# EAGLE board CN-Cape-1.1 (EAGLE 7.7.0)
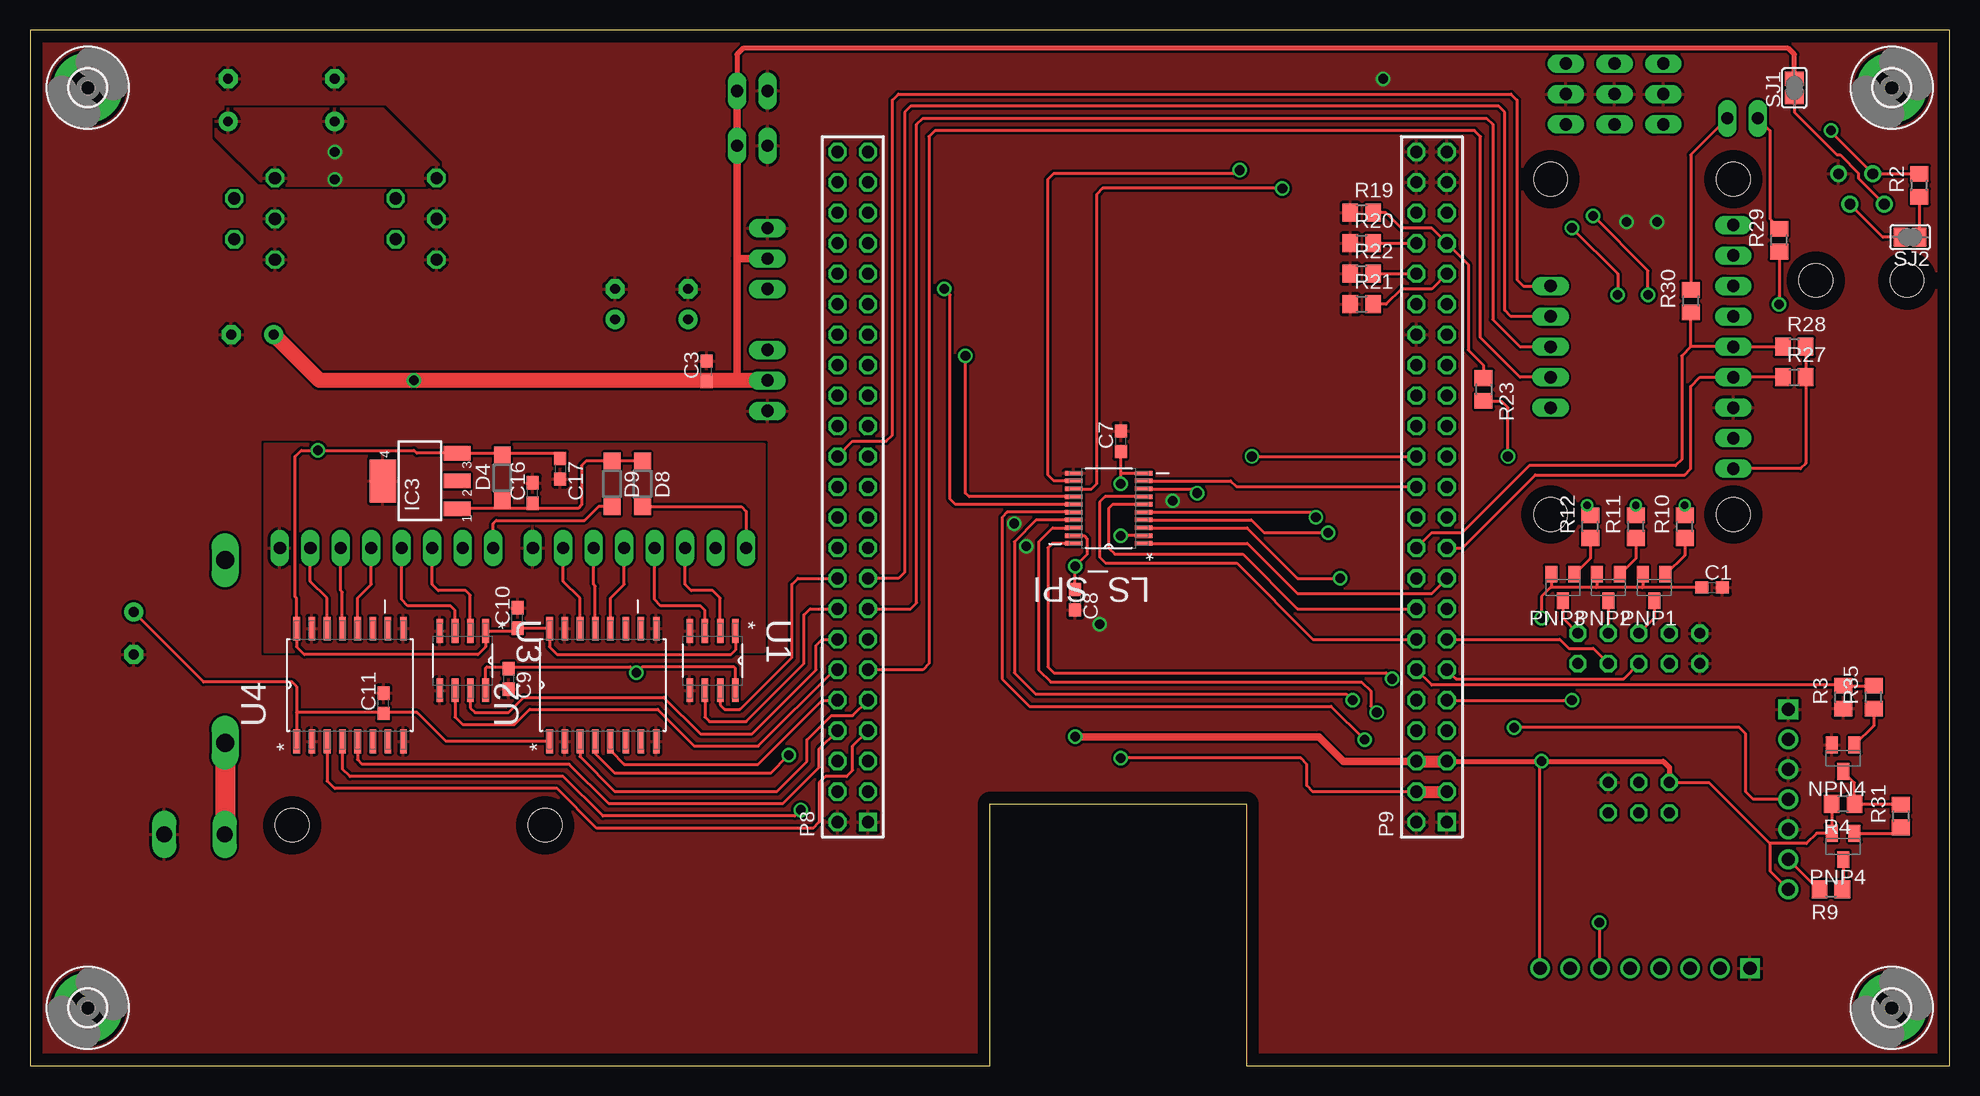
[diagram p0: board, top side]
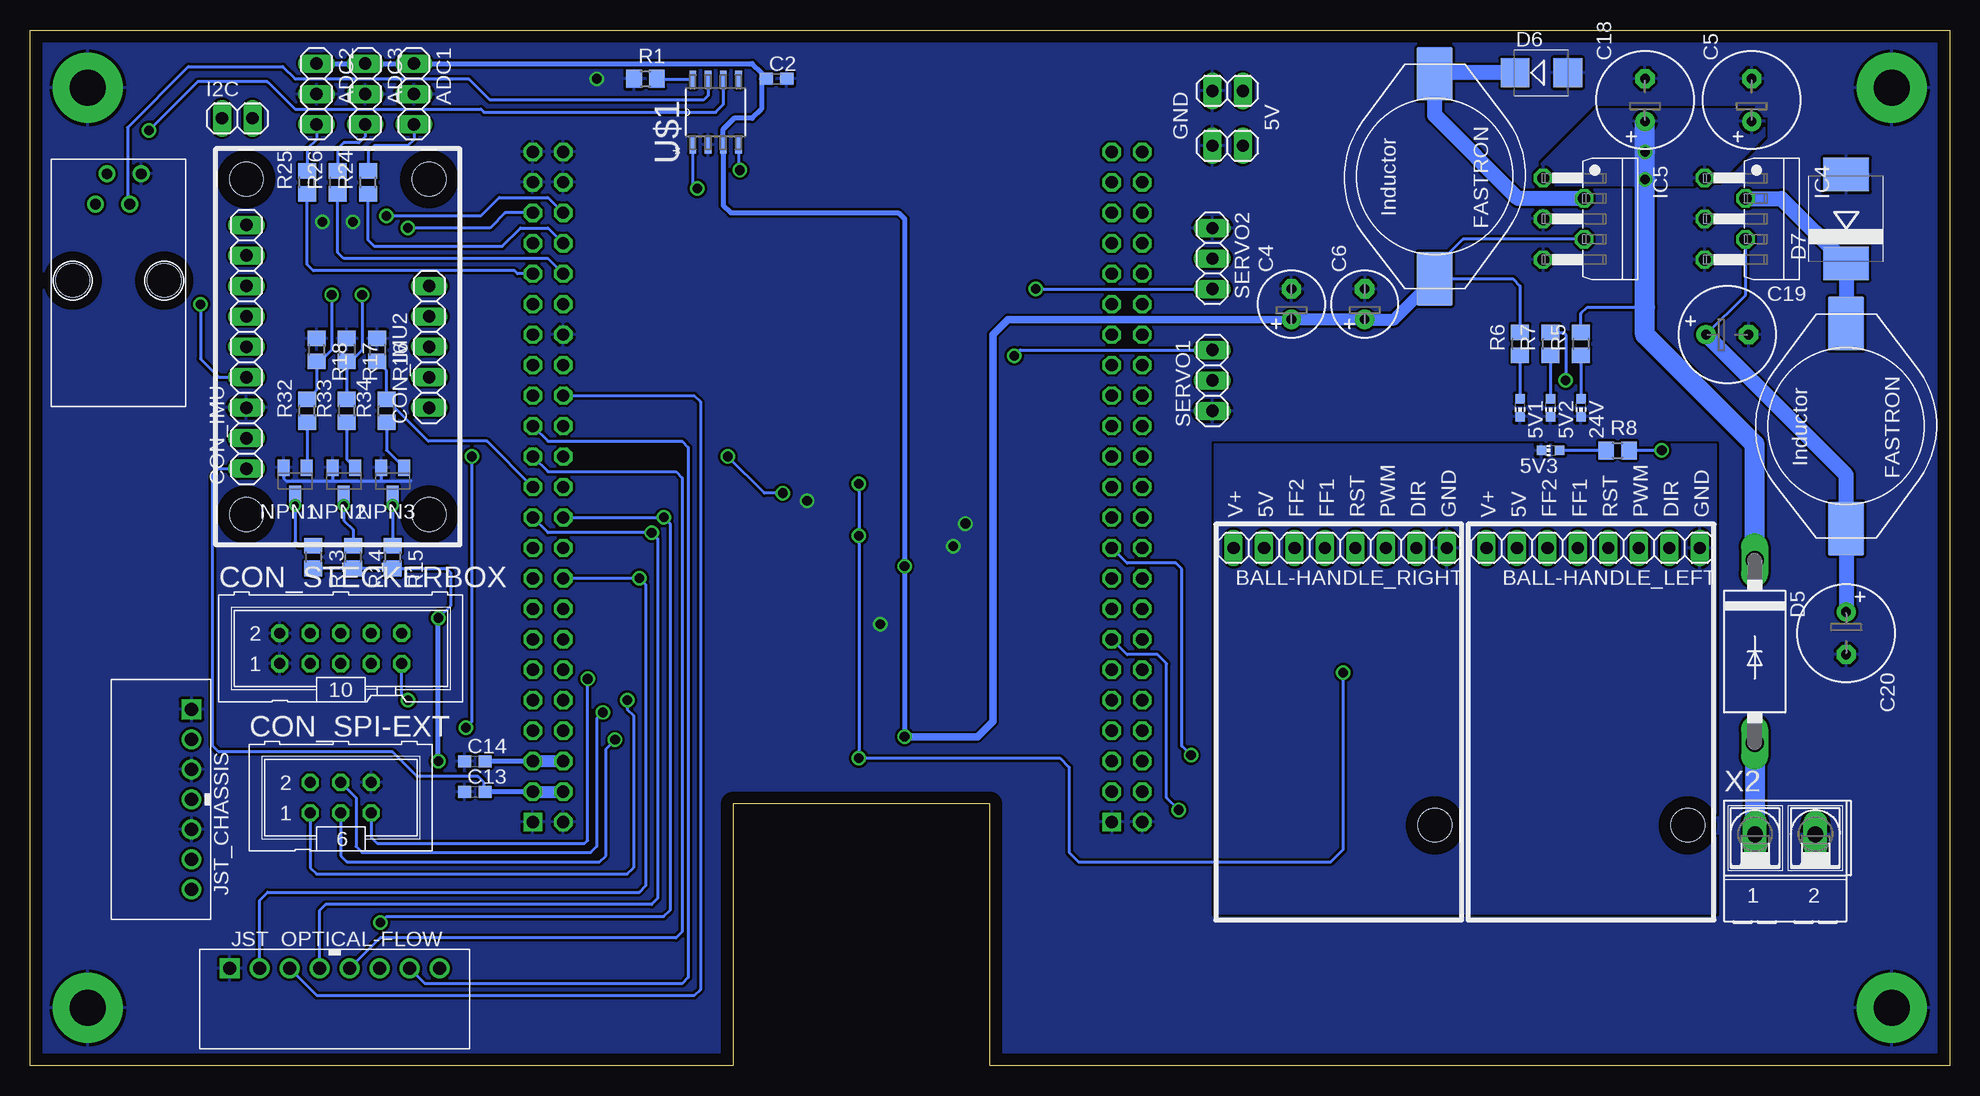
[diagram p1: board, bottom side, seen from below]

Size 160.02 x 86.36 mm. Coordinates in mm from the lower left corner, seen from the top.
Outline: 0,0 80.01,0 80.01,21.86 101.41,21.86 101.41,0 160.02,0 160.02,86.36 0,86.36 0,0
Copper layers (1*16): Top 0.035mm / dielectric 1.5mm / Bottom 0.035mm
Design rules "8mils": minimum track width 8mil, minimum drill 0.6mm, track to track 8mil, track to pad 8mil, pad to pad 8mil, via to via 8mil, smd to smd 8mil, copper to edge 40mil, drill to drill 10mil, minimum pad ring 10mil, minimum via ring 8mil, stop-mask expansion 0mil, vias tented up to drill 0mil, thermal gap 10mil
Holes 2.8 mm at 126.75,73.91 141.99,73.91 126.75,45.97 141.99,45.97 21.84,20.07 42.93,20.07

## Footprints (pad centres in the part's own frame; a part is rotated, then mirrored left to right if it is on the bottom)
CHIP-LED0603 = smd 0.8 x 0.8: A 0,-0.75; C 0,0.75
1X03 = drill 1.016 long: 1 -2.54,0; 2 0,0; 3 2.54,0
1X08 = drill 1.016 long: 1 -8.89,0; 2 -6.35,0; 3 -3.81,0; 4 -1.27,0; 5 1.27,0; 6 3.81,0; 7 6.35,0; 8 8.89,0
C0603 = smd 1.1 x 1: 1 -0.85,0; 2 0.85,0
E2,5-6 = drill 0.813 pad 1.6: + -1.27,0 | drill 0.813 pad 1.6 octagon: - 1.27,0
E3,5-8 = drill 0.813 pad 1.6: + -1.778,0 | drill 0.813 pad 1.6 octagon: - 1.778,0
RJ10 = drill 0.9: P$1 -1.905,6.55; P$2 -0.953,9.09; P$3 0.953,6.55; P$4 1.905,9.09 | hole 2.8: -3.81,0.2; 3.81,0.2
1X09 = drill 1.016 long: 1 -10.16,0; 2 -7.62,0; 3 -5.08,0; 4 -2.54,0; 5 0,0; 6 2.54,0; 7 5.08,0; 8 7.62,0; 9 10.16,0
1X05 = drill 1.016 long: 1 -5.08,0; 2 -2.54,0; 3 0,0; 4 2.54,0; 5 5.08,0
ML6 = drill 0.914 octagon: 1 -2.54,-1.27; 2 -2.54,1.27; 3 0,-1.27; 4 0,1.27; 5 2.54,-1.27; 6 2.54,1.27
ML10 = drill 0.914 octagon: 1 -5.08,-1.27; 2 -5.08,1.27; 3 -2.54,-1.27; 4 -2.54,1.27; 5 0,-1.27; 6 0,1.27; 7 2.54,-1.27; 8 2.54,1.27; 9 5.08,-1.27; 10 5.08,1.27
SOD123 = smd 1.4 x 1.4: A 1.9,0; C -1.9,0
DO27-15 = drill 1.499 long: A 7.62,0; C -7.62,0
SMB = smd 2.4 x 2.4: A 2.2,0; C -2.2,0
SMC = smd 2.8 x 3.8: A 3.7,0; C -3.7,0
3,0-PAD = drill 3 pad 5.842: B3,0 0,0
1X02 = drill 1.016 long: 1 -1.27,0; 2 1.27,0
SOT223 = smd 1.219 x 2.235: 1 -2.311,-3.099; 2 0,-3.099; 3 2.311,-3.099 | smd 3.6 x 2.2: 4 0,3.099
TO220-5_STAGGERED = drill 1.016 octagon: !EN 3.404,-3.404; FB 1.702,0; GND 0,-3.404; IN -3.404,-3.404; OUT -1.702,0
S7B-EH = drill 1.1 square: 1 7.5,0 | drill 1.1: 2 5,0; 3 2.5,0; 4 0,0; 5 -2.5,0; 6 -5,0; 7 -7.5,0
S8B-EH = drill 1.1 square: 1 8.75,0 | drill 1.1: 2 6.25,0; 3 3.75,0; 4 1.25,0; 5 -1.25,0; 6 -3.75,0; 7 -6.25,0; 8 -8.75,0
PISR = smd 4.5 x 3: P$1 -8.55,0; P$2 8.55,0
SOP65P640X120-20N = smd 1.473 x 0.356: 1 -2.921,2.921; 2 -2.921,2.286; 3 -2.921,1.626; 4 -2.921,0.965; 5 -2.921,0.33; 6 -2.921,-0.33; 7 -2.921,-0.965; 8 -2.921,-1.626; 9 -2.921,-2.286; 10 -2.921,-2.921; 11 2.921,-2.921; 12 2.921,-2.286; 13 2.921,-1.626; 14 2.921,-0.965; 15 2.921,-0.33; 16 2.921,0.33; 17 2.921,0.965; 18 2.921,1.626; 19 2.921,2.286; 20 2.921,2.921
SOT23-BEC = smd 1 x 1.4: B -0.95,-1.1; C 0,1.1; E 0.95,-1.1
2X23 = drill 1.016 square: 1 -26.67,-1.27 | drill 1.016 octagon: 2 -26.67,1.27; 3 -24.13,-1.27; 4 -24.13,1.27; 5 -21.59,-1.27; 6 -21.59,1.27; 7 -19.05,-1.27; 8 -19.05,1.27; 9 -16.51,-1.27; 10 -16.51,1.27; 11 -13.97,-1.27; 12 -13.97,1.27; 13 -11.43,-1.27; 14 -11.43,1.27; 15 -8.89,-1.27; 16 -8.89,1.27; 17 -6.35,-1.27; 18 -6.35,1.27; 19 -3.81,-1.27; 20 -3.81,1.27; 21 -1.27,-1.27; 22 -1.27,1.27; 23 1.27,-1.27; 24 1.27,1.27; 25 3.81,-1.27; 26 3.81,1.27; 27 6.35,-1.27; 28 6.35,1.27; 29 8.89,-1.27; 30 8.89,1.27; 31 11.43,-1.27; 32 11.43,1.27; 33 13.97,-1.27; 34 13.97,1.27; 35 16.51,-1.27; 36 16.51,1.27; 37 19.05,-1.27; 38 19.05,1.27; 39 21.59,-1.27; 40 21.59,1.27; 41 24.13,-1.27; 42 24.13,1.27; 43 26.67,-1.27; 44 26.67,1.27; 45 29.21,-1.27; 46 29.21,1.27
R0805 = smd 1.3 x 1.5: 1 -0.95,0; 2 0.95,0
SJ = smd 1.168 x 1.6: 1 -0.762,0; 2 0.762,0
SOIC127P600X175-8N = smd 1.981 x 0.559: 1 -2.464,1.905; 2 -2.464,0.635; 3 -2.464,-0.635; 4 -2.464,-1.905; 5 2.464,-1.905; 6 2.464,-0.635; 7 2.464,0.635; 8 2.464,1.905
SOIC127P1032X265-16N = smd 1.981 x 0.559: 1 -4.699,4.445; 2 -4.699,3.175; 3 -4.699,1.905; 4 -4.699,0.635; 5 -4.699,-0.635; 6 -4.699,-1.905; 7 -4.699,-3.175; 8 -4.699,-4.445; 9 4.699,-4.445; 10 4.699,-3.175; 11 4.699,-1.905; 12 4.699,-0.635; 13 4.699,0.635; 14 4.699,1.905; 15 4.699,3.175; 16 4.699,4.445
SOIC127P600X175-8N' = smd 1.473 x 0.559: 1 -2.718,1.905; 2 -2.718,0.635; 3 -2.718,-0.635; 4 -2.718,-1.905; 5 2.718,-1.905; 6 2.718,-0.635; 7 2.718,0.635; 8 2.718,1.905
AK500/2-H = drill 1.321 long: 1 -2.515,0; 2 2.515,0

## Placement (x,y rotation side)
5V1  [CHIP-LED0603]  35.81,54.86 180 bottom
5V2  [CHIP-LED0603]  33.27,54.86 180 bottom
5V3  [CHIP-LED0603]  33.27,51.31 90 bottom
24V  [CHIP-LED0603]  30.73,54.86 180 bottom
ADC1  [1X03]  128.02,81.03 270 bottom
ADC2  [1X03]  136.14,81.03 270 bottom
ADC3  [1X03]  132.08,81.03 270 bottom
BALL-HANDLE_LEFT  [1X08]  29.72,43.18 180 bottom
BALL-HANDLE_RIGHT  [1X08]  50.8,43.18 180 bottom
C1  100nF  [C0603]  140.21,39.88 0 top
C2  100nF  [C0603]  97.79,82.3 0 bottom
C3  100nF  [C0603]  56.39,57.91 90 top
C4  220µF  [E2,5-6]  54.86,63.5 90 bottom
C5  220µF  [E3,5-8]  16.51,80.52 90 bottom
C6  220µF  [E2,5-6]  48.77,63.5 90 bottom
C7  100nF  [C0603]  90.93,52.07 90 top
C8  100nF  [C0603]  87.12,38.86 270 top
C9  100nF  [C0603]  39.88,32.26 270 top
C10  100nF  [C0603]  40.64,37.34 90 top
C11  100nF  [C0603]  29.46,30.23 90 top
C13  100nF  [C0603]  122.94,22.86 0 bottom
C14  100nF  [C0603]  122.94,25.4 0 bottom
C16  100nF  [C0603]  41.91,47.75 90 top
C17  100nF  [C0603]  44.2,49.78 270 top
C18  220µF  [E3,5-8]  25.4,80.52 90 bottom
C19  470µF  [E3,5-8]  18.54,60.96 0 bottom
C20  470µF  [E3,5-8]  8.64,36.07 270 bottom
CAN  RJ10  [RJ10]  152.65,65.28 0 bottom
CON_IMU  [1X09]  141.99,59.94 90 bottom
CON_IMU2  [1X05]  126.75,59.94 90 bottom
CON_SPI-EXT  [ML6]  134.11,22.35 0 bottom
CON_STECKERBOX  [ML10]  134.11,34.8 0 bottom
D4  [SOD123]  39.37,49.02 90 top
D5  BY550  [DO27-15]  16.26,34.54 270 bottom
D6  MBRS140  [SMB]  34.04,82.8 0 bottom
D7  MBRS360  [SMC]  8.64,70.61 90 bottom
D8  [SOD123]  51.05,48.51 270 top
D9  [SOD123]  48.51,48.51 270 top
H1  MOUNT-PAD-ROUND3.0  [3,0-PAD]  155.19,4.83 0 top
H2  MOUNT-PAD-ROUND3.0  [3,0-PAD]  4.83,81.53 0 top
H3  MOUNT-PAD-ROUND3.0  [3,0-PAD]  155.19,81.53 0 top
H4  MOUNT-PAD-ROUND3.0  [3,0-PAD]  4.83,4.83 0 top
I2C  [1X02]  142.75,78.99 0 bottom
IC3  LM340MP-05  [SOT223]  32.51,48.77 90 top
IC4  LM2576  [TO220-5_STAGGERED]  17.02,70.61 270 bottom
IC5  LM2575  [TO220-5_STAGGERED]  30.48,70.61 270 bottom
JP3  [1X02]  60.2,76.71 180 bottom
JP4  [1X02]  60.2,81.28 180 bottom
JST_CHASSIS  S7PIN  [S7B-EH]  146.56,22.22 90 bottom
JST_OPTICAL-FLOW  S8PIN  [S8B-EH]  134.62,8.13 180 bottom
L1  330µH  [PISR]  42.93,74.17 270 bottom
L2  100µH  [PISR]  8.64,53.34 270 bottom
LS_SPI  TXB0108PWR  [SOP65P640X120-20N]  89.92,46.48 180 top
NPN1  BC849SMD  [SOT23-BEC]  137.92,48.77 180 bottom
NPN2  BC849SMD  [SOT23-BEC]  133.86,48.77 180 bottom
NPN3  BC849SMD  [SOT23-BEC]  129.79,48.77 180 bottom
NPN4  BC849SMD  [SOT23-BEC]  151.13,25.65 180 top
P8  BeagleBoard 2x23  [2X23]  68.58,46.99 90 top
P9  BeagleBoard 2x23  [2X23]  116.84,46.99 90 top
PNP1  BC858BSMD  [SOT23-BEC]  135.38,39.88 180 top
PNP2  BC858BSMD  [SOT23-BEC]  131.57,39.88 180 top
PNP3  BC858BSMD  [SOT23-BEC]  127.76,39.88 180 top
PNP4  BC858BSMD  [SOT23-BEC]  151.13,18.29 180 top
R1  1k  [R0805]  108.71,82.3 0 bottom
R2  120  [R0805]  157.48,73.41 90 top
R3  10k  [R0805]  151.13,30.73 90 top
R4  10k  [R0805]  151.13,21.84 180 top
R5  1200  [R0805]  30.73,60.2 90 bottom
R6  120  [R0805]  35.81,60.2 90 bottom
R7  120  [R0805]  33.27,60.2 90 bottom
R8  120  [R0805]  27.69,51.31 0 bottom
R9  ADJ  [R0805]  150.11,14.73 180 top
R10  10k  [R0805]  137.92,44.96 90 top
R11  10k  [R0805]  133.86,44.96 90 top
R12  10k  [R0805]  130.05,44.96 90 top
R13  10k  [R0805]  136.4,42.42 270 bottom
R14  10k  [R0805]  133.1,42.42 270 bottom
R15  10k  [R0805]  129.79,42.42 270 bottom
R16  10k  [R0805]  131.06,59.69 270 bottom
R17  10k  [R0805]  133.6,59.69 270 bottom
R18  10k  [R0805]  136.14,59.69 270 bottom
R19  1k  [R0805]  111,71.12 0 top
R20  1k  [R0805]  111,68.58 0 top
R21  1k  [R0805]  111,63.5 0 top
R22  1k  [R0805]  111,66.04 0 top
R23  1,8k  [R0805]  121.16,56.39 270 top
R24  1,8k  [R0805]  131.83,73.66 90 bottom
R25  1,8k  [R0805]  136.91,73.66 90 bottom
R26  1,8k  [R0805]  134.37,73.66 90 bottom
R27  10k  [R0805]  147.07,57.4 0 top
R28  10k  [R0805]  147.07,59.94 0 top
R29  330  [R0805]  145.8,68.83 90 top
R30  330  [R0805]  138.43,63.75 90 top
R31  10k  [R0805]  155.96,20.83 90 top
R32  10k  [R0805]  136.91,54.61 90 bottom
R33  10k  [R0805]  133.6,54.61 90 bottom
R34  10k  [R0805]  130.3,54.61 90 bottom
R35  10k  [R0805]  153.67,30.73 90 top
SERVO1  [1X03]  61.47,57.15 90 bottom
SERVO2  [1X03]  61.47,67.31 270 bottom
SJ1  [SJ]  147.07,81.53 90 top
SJ2  [SJ]  156.72,69.09 180 top
U1  ADUM1200ARZ  [SOIC127P600X175-8N]  56.9,33.78 270 top
U2  ADUM1300ARWZ  [SOIC127P1032X265-16N]  47.75,31.75 90 top
U3  ADUM1200ARZ  [SOIC127P600X175-8N]  36.07,33.78 270 top
U4  ADUM1300ARWZ  [SOIC127P1032X265-16N]  26.67,31.75 90 top
U$1  MCP2551-I/SN  [SOIC127P600X175-8N']  102.87,79.5 90 bottom
X2  [AK500/2-H]  13.72,19.3 0 bottom

## Library data of the parts
5V1-5V3 24V = led
ADC1-ADC3 BALL-HANDLE_LEFT BALL-HANDLE_RIGHT CON_IMU CON_IMU2 I2C JP3 JP4 SERVO1 SERVO2 = pinhead
C1-C11 C13 C14 C16-C20 R1-R35 = rcl
CAN = ownParts
CON_SPI-EXT CON_STECKERBOX = con-ml
D4 D8 D9 = diode; REICHELT: SD 101BW
D5-D7 = diode
H1-H4 = holes
IC3 = linear
IC4 IC5 = to220-custom
JST_CHASSIS JST_OPTICAL-FLOW = jst_eh
L1 L2 = inductor_FASTRON
LS_SPI = TI-TXB0108PWR; MPN: TXB0108PWR; OC_FARNELL: 1494945; OC_NEWARK: 27M1151; PACKAGE: TSSOP-20; SUPPLIER: Texas Instruments
NPN1-NPN4 = transistor-npn
P8 P9 = pinhead-2x23
PNP1-PNP4 = transistor-pnp
SJ1 SJ2 = jumper
U1 U3 = ADUM1200; MPN: ADUM1200ARZ; OC_FARNELL: 1078204; OC_NEWARK: 19M0750; PACKAGE: SOIC-8; SUPPLIER: Analog Devices
U2 U4 = ADUM1300; MPN: ADUM1300ARWZ; OC_FARNELL: 1226209; OC_NEWARK: 19M8751; PACKAGE: SOIC-16; SUPPLIER: Analog Devices
U$1 = Microchip-MCP2551-I_SN; MPN: MCP2551-I/SN; OC_FARNELL: 9758569; OC_NEWARK: 69K7604; PACKAGE: SOIC-8; SUPPLIER: Microchip
X2 = con-ptr500

## Nets
!BH_L_RESET: BALL-HANDLE_LEFT.4 U4.12
!BH_L_RESET_3V: P8.8 U4.5
!BH_R_RESET: BALL-HANDLE_RIGHT.4 U2.12
!BH_R_RESET_3V: P8.10 U2.5
+3V3: C7.1 C9.1 C13.2 CON_IMU.1 LS_SPI.2 LS_SPI.10 P9.3 P9.4 R27.2 R28.2 U1.8 U3.8
+5V/1: ADC1.1 ADC2.1 ADC3.1 C1.1 C2.1 C4.+ C6.+ C8.1 C14.2 CON_SPI-EXT.2 IC5.FB JST_CHASSIS.7 JST_OPTICAL-FLOW.8 L1.P$2 LS_SPI.19 P9.5 P9.6 PNP1.E PNP2.E PNP3.E PNP4.E R4.2 R6.2 R13.2 R14.2 R15.2 U$1.3
+5V/2: C3.1 C11.1 C19.+ C20.+ IC4.FB JP3.1 JP4.1 L2.P$2 R7.2 SERVO1.2 SERVO2.2 SJ1.2 U2.1 U4.1
+5V/3: C10.1 C17.1 D4.A IC3.3 R8.2 U1.1 U2.16 U3.1 U4.16
+24V: C5.+ C18.+ D5.C IC4.IN IC5.IN R5.2
+24V/3: C16.1 D4.C D8.C D9.C IC3.1
ADC0_1.8V: P9.39 R19.2 R23.1
ADC1: ADC1.3 R24.2
ADC1_1.8V: P9.40 R20.2 R24.1
ADC2: ADC2.3 R25.2
ADC2_1.8V: P9.37 R21.2 R25.1
ADC3: ADC3.3 R26.2
ADC3_1.8V: P9.38 R22.2 R26.1
BH_L_DIR: BALL-HANDLE_LEFT.2 U4.14
BH_L_DIR_3V: P8.7 U4.3
BH_L_FF1: BALL-HANDLE_LEFT.5 U3.3
BH_L_FF1_3V: P8.12 U3.6
BH_L_FF2: BALL-HANDLE_LEFT.6 U3.2
BH_L_FF2_3V: P8.14 U3.7
BH_L_PWM: BALL-HANDLE_LEFT.3 U4.13
BH_L_PWM_3V: P8.13 U4.4
BH_R_DIR: BALL-HANDLE_RIGHT.2 U2.14
BH_R_DIR_3V: P8.9 U2.3
BH_R_FF1: BALL-HANDLE_RIGHT.5 U1.3
BH_R_FF1_3V: P8.16 U1.6
BH_R_FF2: BALL-HANDLE_RIGHT.6 U1.2
BH_R_FF2_3V: P8.18 U1.7
BH_R_PWM: BALL-HANDLE_RIGHT.3 U2.13
BH_R_PWM_3V: P8.19 U2.4
CAN_RX: LS_SPI.12 U$1.4
CAN_RX_3V: LS_SPI.9 P9.24
CAN_TX: LS_SPI.13 U$1.1
CAN_TX_3V: LS_SPI.8 P9.26
CANH: CAN.P$3 SJ2.2 U$1.7
CANL: CAN.P$2 R2.2 U$1.6
DRDY: CON_IMU2.3 P8.15
GND: 5V1.C 5V2.C 24V.C ADC1.2 ADC2.2 ADC3.2 C1.2 C2.2 C3.2 C4.- C5.- C6.- C7.2 C8.2 C9.2 C11.2 C13.1 C14.1 C18.- C19.- C20.- CAN.P$4 CON_IMU.3 CON_SPI-EXT.6 CON_STECKERBOX.1 CON_STECKERBOX.2 D6.A D7.A H1.B3,0 H2.B3,0 H3.B3,0 H4.B3,0 IC4.!EN IC4.GND IC5.!EN IC5.GND JP3.2 JP4.2 JST_CHASSIS.1 JST_CHASSIS.3 JST_CHASSIS.5 JST_OPTICAL-FLOW.1 LS_SPI.11 NPN1.E NPN2.E NPN3.E NPN4.E P8.1 P8.2 P9.1 P9.2 P9.34 P9.43 P9.44 P9.45 P9.46 R1.1 R3.1 R16.1 R17.1 R18.1 R19.1 R20.1 R21.1 R22.1 SERVO1.1 SERVO2.1 U1.5 U2.2 U2.8 U3.5 U4.2 U4.8 U$1.2 X2.2
GND3: 5V3.C BALL-HANDLE_LEFT.1 BALL-HANDLE_RIGHT.1 C10.2 C16.2 C17.2 IC3.4 U1.4 U2.9 U2.15 U3.4 U4.9 U4.15
I2C2_SCL: CON_IMU.4 P9.19 R27.1 R29.1
I2C2_SDA: CON_IMU.5 P9.20 R28.1 R30.1
INT1: CON_IMU2.4 P8.17
INT2: CON_IMU2.5 P8.26
INTG: CON_IMU2.2 P8.11
LB_ADC: JST_CHASSIS.4 R23.2
N$1: NPN1.C R10.2 R13.1
N$2: NPN2.C R11.2 R14.1
N$3: NPN4.C R4.1 R31.2
N$4: NPN3.C R12.2 R15.1
N$5: D5.A X2.1
N$6: 24V.A R5.1
N$7: 5V1.A R6.1
N$8: 5V2.A R7.1
N$9: R1.2 U$1.8
N$10: R2.1 SJ2.1
N$11: D6.C IC5.OUT L1.P$1
N$12: D7.C IC4.OUT L2.P$1
N$13: BALL-HANDLE_LEFT.8 D9.A
N$14: BALL-HANDLE_RIGHT.8 D8.A
N$15: 5V3.A R8.1
N$16: JST_CHASSIS.6 R9.2
N$17: I2C.1 R29.2
N$18: I2C.2 R30.2
N$19: CAN.P$1 SJ1.1
N$20: PNP1.B R10.1
N$21: PNP2.B R11.1
N$22: PNP3.B R12.1
N$23: PNP4.B R31.1
N$24: NPN1.B R32.1
N$25: NPN2.B R33.1
N$26: NPN3.B R34.1
N$27: NPN4.B R35.1
OF_LED: PNP4.C R9.1
OF_LED_3V: P9.12 R3.2 R35.2
OF_NCS_3V: JST_OPTICAL-FLOW.3 P9.30
OF_NPD_3V: JST_OPTICAL-FLOW.5 P9.25
OF_RST_3V: JST_OPTICAL-FLOW.7 P9.27
SERVO_PWM: LS_SPI.14 SERVO1.3
SERVO_PWM2: LS_SPI.15 SERVO2.3
SERVO_PWM2_3V: LS_SPI.6 P9.16
SERVO_PWM_3V: LS_SPI.7 P9.14
SPI0_CLK: JST_OPTICAL-FLOW.6 LS_SPI.5 P9.22
SPI0_CS: LS_SPI.1 P9.17
SPI0_D0_MISO: JST_OPTICAL-FLOW.4 LS_SPI.4 P9.21
SPI0_D1_MOSI: JST_OPTICAL-FLOW.2 LS_SPI.3 P9.18
SPI_CLK: CON_SPI-EXT.3 LS_SPI.16
SPI_CS: CON_SPI-EXT.5 LS_SPI.20
SPI_MISO: CON_SPI-EXT.1 LS_SPI.17
SPI_MOSI: CON_SPI-EXT.4 LS_SPI.18
SW_BUNDLE-LED: CON_STECKERBOX.8 PNP2.C
SW_BUNDLE-LED_3V: P9.41 R17.2 R33.2
SW_BUNDLE_3V: CON_STECKERBOX.7 P9.13
SW_POWER-LED: CON_STECKERBOX.10 PNP3.C
SW_POWER-LED_3V: P9.23 R16.2 R34.2
SW_PWR_BUT: CON_STECKERBOX.9 P9.9
SW_VISION-LED: CON_STECKERBOX.6 PNP1.C
SW_VISION-LED_3V: P9.42 R18.2 R32.2
SW_VISION_3V: CON_STECKERBOX.5 P9.11

## Tracks (layer width: path | path; a pad name or v marks a point on that pad's centre or on a via)
!BH_L_RESET
  Top 0.254: U4.12 27.3,38.99 28.45,40.13 BALL-HANDLE_LEFT.4
!BH_L_RESET_3V
  Top 0.254: U4.5 27.3,25.53 27.69,25.15 44.96,25.15 48.26,21.84 62.74,21.84 65.79,24.89 65.79,26.42 P8.8
!BH_R_RESET
  Top 0.254: U2.12 48.39,38.99 49.53,40.13 BALL-HANDLE_RIGHT.4
!BH_R_RESET_3V
  Top 0.254: P8.10 66.04,30.48 60.71,25.15 49.53,25.15 48.39,26.29 U2.5
+3V3  (via drill 0.8)
  Top 0.254: 39.88,33.27 38.1,33.27 37.97,33.15 U3.8 | U1.8 58.8,33.15 58.67,33.27 51.05,33.27 v50.55,32.77 50.04,33.27 39.88,33.27 | P9.4 106.93,22.86 106.43,23.37 106.43,25.15 105.92,25.65 v90.93,25.65 | LS_SPI.2 v90.93,44.2 | C7.1 v90.93,48.51 90.93,49.4 LS_SPI.10 | CON_IMU.1 147.57,49.78 148.02,50.23 R27.2 R28.2 | C9.1 39.88,33.27
  Top 1.016: P9.4 P9.3
  Bottom 0.254: v90.93,48.51 v90.93,44.2 v90.93,25.65 74.17,25.65 73.41,24.89 73.41,17.78 72.64,17.02 51.56,17.02 50.55,18.03 v50.55,32.77 | C13.2 122.17,22.95 122.17,23.62 122.68,24.13 127.76,24.13 129.79,26.16 144.27,26.16 144.78,26.67 144.78,49.28 144.27,49.78 CON_IMU.1
  Bottom 0.406: P9.3 C13.2
  Bottom 1.016: P9.3 P9.4
+5V/1  (via drill 0.8)
  Top 0.254: PNP1.E 134.43,39.94 | 134.43,39.94 134.37,39.88 130.56,39.88 | 130.56,39.88 126.75,39.88 | PNP3.E 126.81,39.94 126.75,39.88 | R4.2 PNP4.E 148.93,19.39 148.08,18.54 145.03,18.54 | 145.03,18.54 145.03,16.24 JST_CHASSIS.7 | CON_SPI-EXT.2 139.95,23.62 145.03,18.54 | JST_OPTICAL-FLOW.8 125.87,25.29 v125.98,25.4 | LS_SPI.19 87.88,44.2 88.14,43.94 88.14,42.67 v87.12,41.66 C8.1 | 126.75,39.88 125.98,39.12 v125.98,37.34 | PNP2.E 130.62,39.94 130.56,39.88 | C1.1 134.43,39.88 134.43,39.94
  Top 0.406: P9.5 v125.98,25.4 136.14,25.4 136.65,24.89 CON_SPI-EXT.2
  Top 0.61: v87.12,27.43 107.44,27.43 109.47,25.4 P9.6
  Top 1.016: P9.6 P9.5
  Bottom 0.254: R13.2 R14.2 R15.2 125.29,41.47 124.97,41.15 124.97,38.35 v125.98,37.34 | IC5.FB 40.56,68.91 42.93,66.55 L1.P$2 36.41,65.62 35.81,65.02 R6.2 | C2.1 99.06,82.3
  Bottom 0.406: P9.5 C14.2 | ADC2.1 ADC3.1 ADC1.1 99.82,83.57 99.06,82.8 99.06,82.3 99.06,79.76 99.82,78.99 101.35,78.99 102.23,78.11 U$1.3 102.23,71.75 101.6,71.12 87.63,71.12 87.12,70.61 v87.12,41.66 v87.12,27.43 | v125.98,25.4 v125.98,37.34
  Bottom 0.61: v87.12,27.43 81.03,27.43 79.76,28.7 79.76,60.96 78.49,62.23 C4.+
  Bottom 1.016: P9.6 P9.5 | L1.P$2 46.31,62.23 C6.+ C4.+
  Bottom 1.27: L1.P$2 43.01,65.53
+5V/2  (via drill 0.8)
  Top 0.254: C3.1 57.57,57.06 57.66,57.15 | C20.+ 14.48,32 21.84,32 22.23,31.62 22.23,29.46 | 22.23,29.46 U4.1 | U2.1 34.67,27.05 32.26,29.46 29.46,29.46 | 29.46,29.46 22.23,29.46 | C11.1 29.46,29.46
  Top 0.406: SJ1.2 147.07,84.33 146.56,84.84 59.44,84.84 58.93,84.33 JP4.1
  Top 0.61: SERVO2.2 58.93,67.31 | JP4.1 JP3.1 58.93,67.31 | 58.93,67.31 58.93,57.15
  Top 1.27: SERVO1.2 58.93,57.15 57.66,57.15 v32,57.15 24.13,57.15 C19.+
  Bottom 0.254: C19.+ 17.02,64.26 IC4.FB | R7.2 32.19,61.15 32,60.96 v32,57.15
  Bottom 1.27: C20.+ L2.P$2 8.64,49.28 C19.+
+5V/3  (via drill 0.8)
  Top 0.254: 39.37,51.08 IC3.3 32.23,51.08 32,51.31 v24,51.31 22.61,51.31 22.1,50.8 22.1,39.12 22.23,38.99 U4.16 22.23,34.92 22.86,34.29 37.34,34.29 37.97,34.92 U3.1 40.4,36.25 C10.1 40.68,36.45 U2.16 43.31,34.92 43.94,34.29 58.42,34.29 58.8,34.67 U1.1 | 39.37,51.08 43.75,51.08 C17.1 | D4.A 39.37,51.08
  Bottom 0.254: v24,51.31 R8.2
+24V  (via drill 0.8)
  Bottom 0.254: R5.2 30.73,62.74 30.23,63.25 25.4,63.25
  Bottom 1.676: D5.C 16.26,51.82 25.4,60.96 25.4,63.25 v25.4,73.91 v25.4,76.2 C18.+
  pour Bottom: 15.49,78.99 15.49,77.47 19.56,73.41 34.54,73.41 34.54,74.68 29.46,79.76 16.26,79.76
  pour Top: 15.49,78.99 15.49,77.47 19.56,73.41 34.54,73.41 34.54,74.68 29.46,79.76 16.26,79.76
+24V/3
  Top 0.254: D8.C D9.C 46.35,50.41 45.97,50.04 45.97,46.74 45.72,46.48 41.91,46.48 | 41.91,46.48 39.37,46.48 | 39.37,46.48 35.64,46.48 IC3.1 | D4.C 39.37,46.48 | C16.1 41.91,46.48
ADC0_1.8V
  Top 0.254: R19.2 113.03,71.12 114.3,69.85 116.84,69.85 P9.39 119.89,66.8 119.89,59.69 121.16,58.42 R23.1
ADC1
  Bottom 0.254: ADC1.3 128.02,77.22 128.52,76.71 131.32,76.71 131.83,76.2 R24.2
ADC1_1.8V
  Top 0.254: R20.2 P9.40
  Bottom 0.254: P9.40 116.84,69.85 119.13,69.85 120.65,68.33 131.32,68.33 131.83,68.83 R24.1
ADC2
  Bottom 0.254: ADC2.3 136.14,77.22 136.91,76.45 R25.2
ADC2_1.8V
  Top 0.254: P9.37 116.84,64.77 114.3,64.77 113.03,63.5 R21.2
  Bottom 0.254: P9.37 119.38,66.04 119.63,66.29 136.4,66.29 136.91,66.8 R25.1
ADC3
  Bottom 0.254: ADC3.3 132.08,77.47 132.59,76.96 133.86,76.96 134.37,76.45 R26.2
ADC3_1.8V
  Top 0.254: R22.2 P9.38
  Bottom 0.254: P9.38 116.84,67.31 133.86,67.31 134.37,67.82 R26.1
BH_L_DIR
  Top 0.254: U4.14 24.77,38.99 23.37,40.39 BALL-HANDLE_LEFT.2
BH_L_DIR_3V
  Top 0.254: P8.7 68.58,26.67 68.58,24.64 68.07,24.13 66.29,24.13 65.79,23.62 65.79,20.32 65.28,19.81 47.24,19.81 43.94,23.11 25.4,23.11 24.77,23.75 U4.3
BH_L_FF1
  Top 0.254: U3.3 35.43,37.97 35.05,38.35 31.5,38.35 30.99,38.86 BALL-HANDLE_LEFT.5
BH_L_FF1_3V
  Top 0.254: U3.6 35.43,29.08 36.07,28.45 40.39,28.45 41.66,29.72 52.32,29.72 55.37,26.67 60.71,26.67 67.06,33.02 P8.12
BH_L_FF2
  Top 0.254: U3.2 36.7,39.24 36.32,39.62 34.04,39.62 33.53,40.13 BALL-HANDLE_LEFT.6
BH_L_FF2_3V
  Top 0.254: U3.7 36.7,29.84 37.08,29.46 39.88,29.46 41.15,30.73 52.83,30.73 55.88,27.69 60.2,27.69 65.53,33.02 65.53,35.05 66.04,35.56 P8.14
BH_L_PWM
  Top 0.254: U4.13 26.04,39.5 25.91,39.62 BALL-HANDLE_LEFT.3
BH_L_PWM_3V  (via drill 0.8)
  Top 0.254: v64.26,21.34 63.75,20.83 47.75,20.83 44.45,24.13 26.67,24.13 26.04,24.77 U4.4
  Bottom 0.254: P8.13 68.58,34.29 66.04,34.29 65.28,33.53 65.28,22.35 v64.26,21.34
BH_R_DIR
  Top 0.254: U2.14 45.85,38.99 44.45,40.39 BALL-HANDLE_RIGHT.2
BH_R_DIR_3V
  Top 0.254: P8.9 68.58,29.21 66.8,29.21 64.77,27.18 64.77,25.4 62.23,22.86 48.77,22.86 45.85,25.78 U2.3
BH_R_FF1
  Top 0.254: U1.3 56.26,37.97 55.88,38.35 52.58,38.35 52.07,38.86 BALL-HANDLE_RIGHT.5
BH_R_FF1_3V
  Top 0.254: U1.6 56.26,29.08 56.64,28.7 59.69,28.7 64.52,33.53 64.52,37.59 65.02,38.1 P8.16
BH_R_FF2
  Top 0.254: U1.2 57.53,38.99 56.9,39.62 55.12,39.62 54.61,40.13 BALL-HANDLE_RIGHT.6
BH_R_FF2_3V
  Top 0.254: U1.7 57.53,30.1 57.91,29.72 59.18,29.72 63.5,34.04 63.5,40.13 64.01,40.64 P8.18
BH_R_PWM
  Top 0.254: U2.13 47.12,40.01 46.99,40.13 BALL-HANDLE_RIGHT.3
BH_R_PWM_3V  (via drill 0.8)
  Top 0.254: v63.25,25.91 61.72,24.38 48.77,24.38 47.12,26.04 U2.4
  Bottom 0.254: v63.25,25.91 64.01,26.67 64.01,41.4 64.52,41.91 68.58,41.91 P8.19
CAN_RX  (via drill 0.8)
  Top 0.254: LS_SPI.12 85.34,48.77 84.84,49.28 84.84,73.91 85.34,74.42 100.58,74.42 v100.84,74.68
  Bottom 0.254: U$1.4 100.97,74.8 v100.84,74.68
CAN_RX_3V
  Top 0.254: P9.24 100.58,48.26 100.08,48.77 LS_SPI.9
CAN_TX  (via drill 0.8)
  Top 0.254: v104.39,73.15 89.41,73.15 88.9,72.64 88.9,48.51 88.49,48.11 LS_SPI.13
  Bottom 0.254: U$1.1 104.78,73.53 v104.39,73.15
CAN_TX_3V  (via drill 0.8)
  Top 0.254: v101.85,50.8 P9.26 | LS_SPI.8 96.93,48.11 v97.28,47.75
  Bottom 0.254: v97.28,47.75 98.81,47.75 v101.85,50.8
CANH
  Top 0.254: SJ2.2 154.44,69.09 CAN.P$3
  Bottom 0.254: U$1.7 103.5,80.9 103.89,80.52 121.67,80.52 123.44,82.3 137.92,82.3 138.94,83.31 146.81,83.31 151.89,78.23 151.89,72.02 CAN.P$3
CANL  (via drill 0.8)
  Top 0.254: R2.2 153.62,74.36 CAN.P$2 150.11,77.86 v150.11,77.98
  Bottom 0.254: U$1.6 102.23,80.14 102.87,79.5 122.17,79.5 122.43,79.76 137.92,79.76 140.21,82.04 146.05,82.04 v150.11,77.98
DRDY
  Top 0.254: P8.15 73.41,38.1 73.91,38.61 73.91,78.49 74.42,78.99 121.41,78.99 121.92,78.49 121.92,62.23 124.21,59.94 CON_IMU2.3
GND  (via drill 0.8)
  Bottom 0.254: NPN1.E 138.87,48.96 138.68,48.77 134.87,48.77 | 134.87,48.77 130.81,48.77 | 130.81,48.77 128.27,48.77 | NPN3.E 130.74,48.83 130.81,48.77 | NPN2.E 134.81,48.83 134.87,48.77
  other vias: 82.04,45.21 95.25,47.12 89.15,36.83 83.06,43.31 133.1,70.36 135.64,70.36 112.78,82.3
  pour Top (rank 6): 0,86.36 160.02,86.36 160.02,0 0,0
  pour Bottom (rank 6): 0,86.36 160.02,86.36 160.02,0 0,0
GND3
  pour Top (rank 2): 19.56,51.82 19.56,34.54 61.21,34.54 61.21,51.82
  pour Bottom: 19.56,51.82 19.56,12.7 61.21,12.7 61.21,51.82
I2C2_SCL  (via drill 0.8)
  Top 0.254: P9.19 119.38,43.18 125.48,49.28 137.92,49.28 138.43,49.78 138.43,56.64 139.19,57.4 CON_IMU.4 R27.1 | R29.1 v145.8,63.5
  Bottom 0.254: v145.8,63.5 145.8,58.93 144.27,57.4 CON_IMU.4
I2C2_SDA
  Top 0.254: P9.20 116.84,44.45 119.38,44.45 124.97,50.04 137.16,50.04 137.67,50.55 137.67,59.18 138.43,59.94 | 138.43,59.94 CON_IMU.5 R28.1 | 138.43,59.94 R30.1
INT1
  Top 0.254: CON_IMU2.4 123.44,62.48 122.94,62.99 122.94,79.5 122.43,80.01 73.41,80.01 72.9,79.5 72.9,41.15 72.39,40.64 P8.17
INT2
  Top 0.254: P8.26 68.58,52.07 71.37,52.07 71.88,52.58 71.88,80.52 72.39,81.03 123.44,81.03 123.95,80.52 123.95,65.53 124.46,65.02 CON_IMU2.5
INTG
  Top 0.254: CON_IMU2.2 124.21,57.4 120.9,60.71 120.9,77.47 120.4,77.98 75.44,77.98 74.93,77.47 74.93,33.53 74.42,33.02 P8.11
LB_ADC  (via drill 0.8)
  Top 0.254: v123.19,50.8 123.19,54.86 122.68,55.37 121.22,55.37 R23.2 | JST_CHASSIS.4 143.64,22.22 143,22.86 143,27.69 142.49,28.19 v123.7,28.19
  Bottom 0.254: v123.19,50.8 123.19,28.7 v123.7,28.19
N$1  (via drill 0.6)
  Top 0.254: R10.2 v137.92,46.74
  Bottom 0.254: NPN1.C v137.92,46.74 137.92,43.69 137.6,43.37 R13.1
N$2  (via drill 0.6)
  Top 0.254: R11.2 v133.86,46.74
  Bottom 0.254: NPN2.C v133.86,46.74 133.86,45.47 133.1,44.7 R14.1
N$3
  Top 0.254: NPN4.C 152.08,23.6 R4.1 155.89,21.84 R31.2
N$4  (via drill 0.6)
  Top 0.254: R12.2 v129.79,46.74
  Bottom 0.254: NPN3.C v129.79,46.74 R15.1
N$5
  Top 1.676: D5.A 16.26,19.33 X2.1
  Bottom 1.676: D5.A 16.26,19.3
N$6
  Bottom 0.254: R5.1 24V.A
N$7
  Bottom 0.254: R6.1 5V1.A
N$8
  Bottom 0.254: R7.1 5V2.A
N$9
  Bottom 0.254: U$1.8 107.69,82.22 R1.2
N$10
  Top 0.254: R2.1 SJ2.1
N$11
  Bottom 1.27: D6.C 42.84,82.8 L1.P$1 42.93,79.25 35.99,72.31 IC5.OUT
N$12
  Bottom 1.27: L2.P$1 D7.C 14.04,72.31 IC4.OUT
N$13
  Top 0.254: BALL-HANDLE_LEFT.8 38.61,45.21 38.86,45.47 46.23,45.47 47.38,46.61 D9.A
N$14
  Top 0.254: D8.A 59.3,46.61 59.69,46.23 BALL-HANDLE_RIGHT.8
N$15
  Bottom 0.254: R8.1 5V3.A
N$16
  Top 0.254: R9.2 149.04,14.73 JST_CHASSIS.6
N$17
  Top 0.254: I2C.1 145.03,77.98 145.03,70.61 145.8,69.85 R29.2
N$18
  Top 0.254: I2C.2 138.43,75.95 R30.2
N$19
  Top 0.254: SJ1.1 147.07,79.5 150.62,75.95 150.88,75.95 152.4,74.42 152.4,73.99 CAN.P$1
N$20
  Top 0.254: R10.1 137.92,42.57 PNP1.B
N$21
  Top 0.254: R11.1 133.86,42.31 PNP2.B
N$22
  Top 0.254: R12.1 130.05,42.31 PNP3.B
N$23
  Top 0.254: PNP4.B 155.47,19.39 R31.1
N$24
  Bottom 0.254: R32.1 136.91,49.93 NPN1.B
N$25
  Bottom 0.254: R33.1 133.6,50.56 NPN2.B
N$26
  Bottom 0.254: R34.1 130.3,51.33 NPN3.B
N$27
  Top 0.254: R35.1 153.67,28.34 NPN4.B
OF_LED
  Top 0.254: PNP4.C 151.13,14.8 R9.1
OF_LED_3V
  Top 0.254: P9.12 116.84,31.75 151.06,31.75 R3.2 R35.2
OF_NCS_3V
  Bottom 0.254: P9.30 104.65,55.88 104.14,55.37 104.14,6.35 104.65,5.84 136.08,5.84 JST_OPTICAL-FLOW.3
OF_NPD_3V
  Bottom 0.254: P9.25 116.84,49.53 106.17,49.53 105.66,49.02 105.66,11.18 106.17,10.67 130.83,10.67 JST_OPTICAL-FLOW.5
OF_RST_3V
  Bottom 0.254: P9.27 116.84,52.07 105.66,52.07 105.16,51.56 105.16,7.37 105.66,6.86 127.1,6.86 JST_OPTICAL-FLOW.7
SERVO_PWM  (via drill 0.8)
  Top 0.254: LS_SPI.14 78.28,47.45 77.98,47.75 v77.98,59.18
  Bottom 0.254: SERVO1.3 77.47,59.69 v77.98,59.18
SERVO_PWM2  (via drill 0.8)
  Top 0.254: LS_SPI.15 77.14,46.81 76.71,47.24 76.71,64.26 v76.2,64.77
  Bottom 0.254: v76.2,64.77 SERVO2.3
SERVO_PWM2_3V
  Top 0.254: P9.16 105.66,38.1 101.09,42.67 90.42,42.67 89.92,43.18 89.92,46.48 90.25,46.81 LS_SPI.6
SERVO_PWM_3V
  Top 0.254: P9.14 106.93,35.56 100.58,41.91 89.66,41.91 89.15,42.42 89.15,46.99 89.61,47.45 LS_SPI.7
SPI0_CLK  (via drill 0.8)
  Top 0.254: JST_OPTICAL-FLOW.6 130.87,11.88 v130.81,11.94 | LS_SPI.5 106.76,46.15 v107.19,45.72
  Bottom 0.254: P9.22 v107.19,45.72 106.68,45.21 106.68,12.95 107.19,12.45 130.3,12.45 v130.81,11.94
SPI0_CS
  Top 0.254: LS_SPI.1 101.47,43.56 105.66,39.37 116.84,39.37 P9.17
SPI0_D0_MISO  (via drill 0.8)
  Top 0.254: LS_SPI.4 101.8,45.52 102.87,44.45 v108.2,44.45
  Bottom 0.254: JST_OPTICAL-FLOW.4 135.87,12.97 135.38,13.46 108.2,13.46 107.7,13.97 107.7,43.94 v108.2,44.45 116.84,44.45 P9.21
SPI0_D1_MOSI  (via drill 0.8)
  Top 0.254: LS_SPI.3 101.45,44.86 105.66,40.64 v109.22,40.64
  Bottom 0.254: JST_OPTICAL-FLOW.2 140.87,13.82 140.21,14.48 109.22,14.48 108.71,14.99 108.71,40.13 v109.22,40.64 P9.18
SPI_CLK  (via drill 0.8)
  Top 0.254: LS_SPI.16 81.46,46.15 81.03,45.72 81.03,32.26 83.31,29.97 108.46,29.97 v111.25,27.18
  Bottom 0.254: CON_SPI-EXT.3 134.11,17.53 133.6,17.02 112.52,17.02 112.01,17.53 112.01,26.42 v111.25,27.18
SPI_CS  (via drill 0.8)
  Top 0.254: LS_SPI.20 85.22,43.56 84.84,43.18 84.84,33.27 85.34,32.77 113.03,32.77 v113.54,32.26
  Bottom 0.254: CON_SPI-EXT.5 131.57,19.05 131.06,18.54 113.79,18.54 113.54,18.8 v113.54,32.26
SPI_MISO  (via drill 0.8)
  Top 0.254: LS_SPI.17 83.87,45.52 82.04,43.69 82.04,32.77 83.82,30.99 109.73,30.99 v110.24,30.48
  Bottom 0.254: CON_SPI-EXT.1 136.65,16.51 136.14,16 110.24,16 109.73,16.51 109.73,29.21 110.24,29.72 v110.24,30.48
SPI_MOSI  (via drill 0.8)
  Top 0.254: LS_SPI.18 85.24,44.86 84.07,43.69 84.07,33.02 85.09,32 111,32 111.76,31.24 111.76,29.97 v112.27,29.46
  Bottom 0.254: CON_SPI-EXT.4 132.84,22.35 132.84,18.29 132.33,17.78 113.28,17.78 112.78,18.29 112.78,28.96 v112.27,29.46
SW_BUNDLE-LED
  Top 0.254: PNP2.C CON_STECKERBOX.8
SW_BUNDLE-LED_3V  (via drill 0.8)
  Top 0.254: v128.52,69.85 132.33,66.04 v132.33,64.26
  Bottom 0.254: P9.41 120.4,71.12 121.67,69.85 v128.52,69.85 | v132.33,64.26 132.33,59.69 133.1,58.93 133.42,58.93 R17.2 R33.2
SW_BUNDLE_3V
  Top 0.254: P9.13 127.51,35.56 128.27,34.8 130.3,34.8 CON_STECKERBOX.7
SW_POWER-LED
  Top 0.254: PNP3.C 127.76,37.34 CON_STECKERBOX.10
SW_POWER-LED_3V
  Bottom 0.254: P9.23 121.92,52.07 126.81,52.07 R34.2 130.3,57.98 R16.2
SW_PWR_BUT  (via drill 0.8)
  Top 0.254: P9.9 v128.52,30.48
  Bottom 0.254: v128.52,30.48 129.03,30.99 CON_STECKERBOX.9
SW_VISION-LED
  Top 0.254: PNP1.C 135.38,37.34 CON_STECKERBOX.6
SW_VISION-LED_3V  (via drill 0.8)
  Top 0.254: v134.87,64.26 134.87,66.29 v130.3,70.87
  Bottom 0.254: v130.3,70.87 122.43,70.87 120.9,72.39 116.84,72.39 P9.42 | v134.87,64.26 134.87,59.69 135.64,58.93 135.96,58.93 R18.2 136.14,56.32 R32.2
SW_VISION_3V
  Top 0.254: P9.11 118.87,32.26 132.84,32.26 CON_STECKERBOX.5

## Text on the board
bNames: 5V | GND | GND | DIR | PWM | RST | FF1 | FF2 | 5V | V+ | GND | DIR | PWM | RST | FF1 | FF2 | 5V | V+